# Altium PCB pwr_fpga.PcbDoc
Units mil, origin at the board's own origin, x right, y up, seen from the top; angles counter-clockwise.
Board outline 1185.04 x 1173.23 mil, 2 copper layers (Top Layer, Bottom Layer); 33 components, 21 nets, 94 pads, 108 vias.
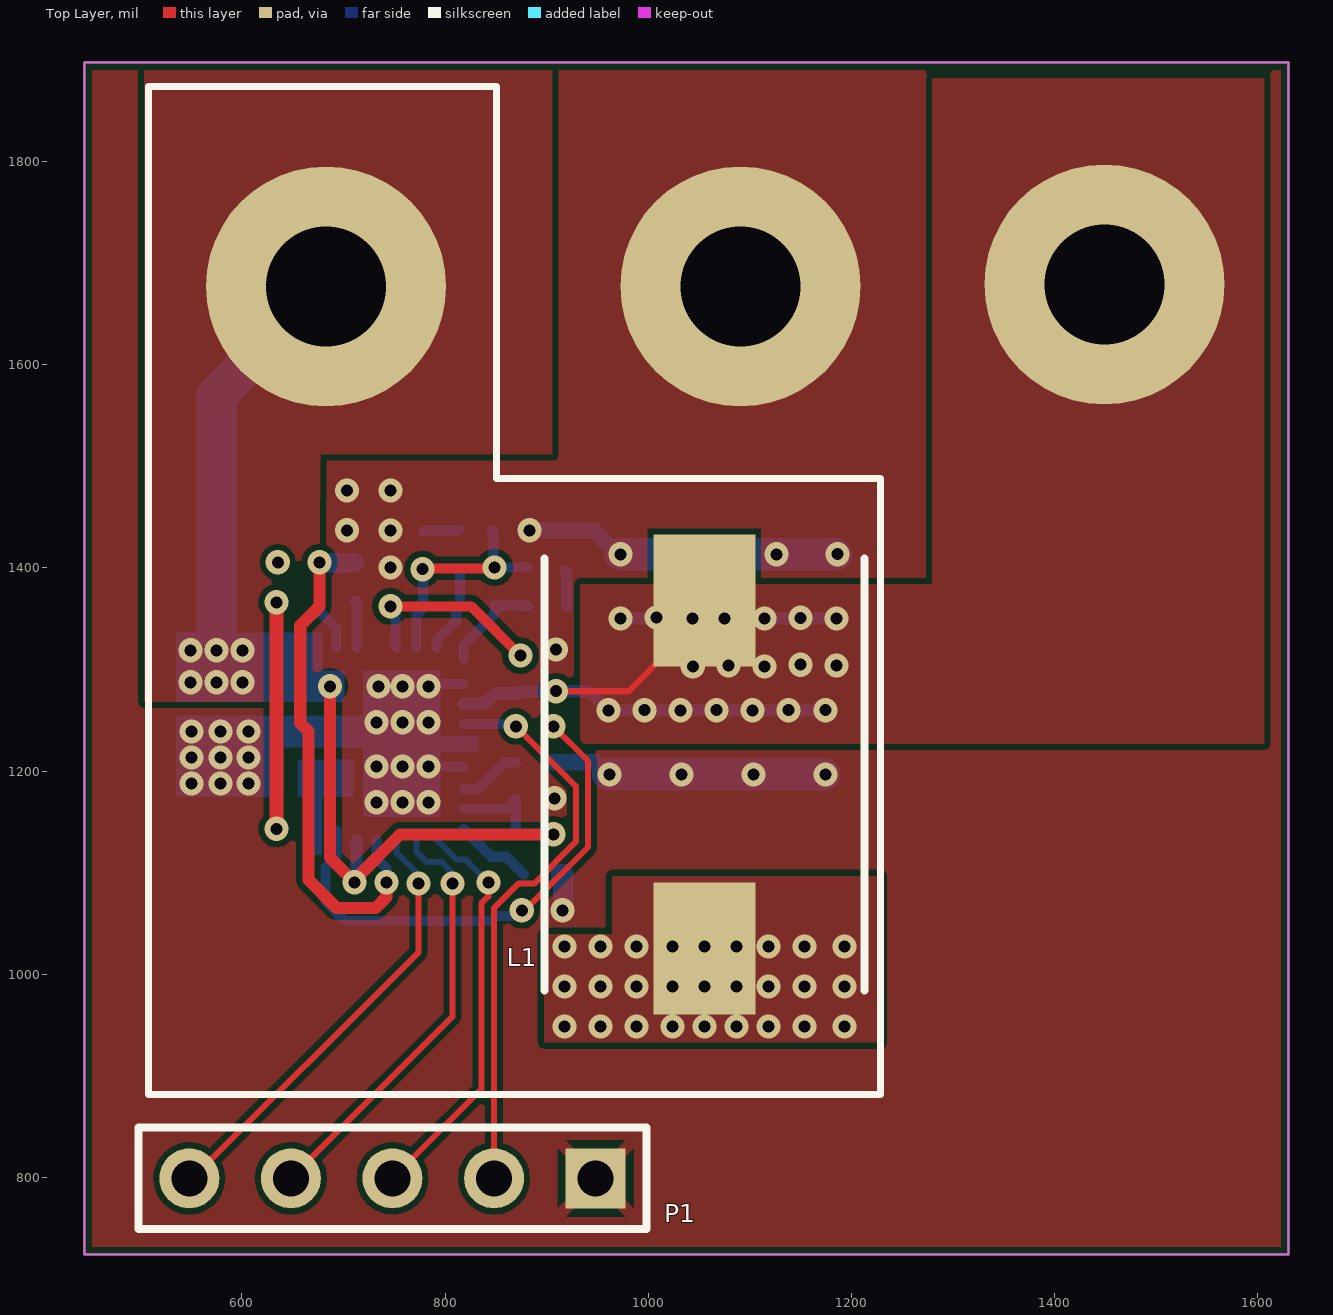
[diagram p0: Top Layer view]
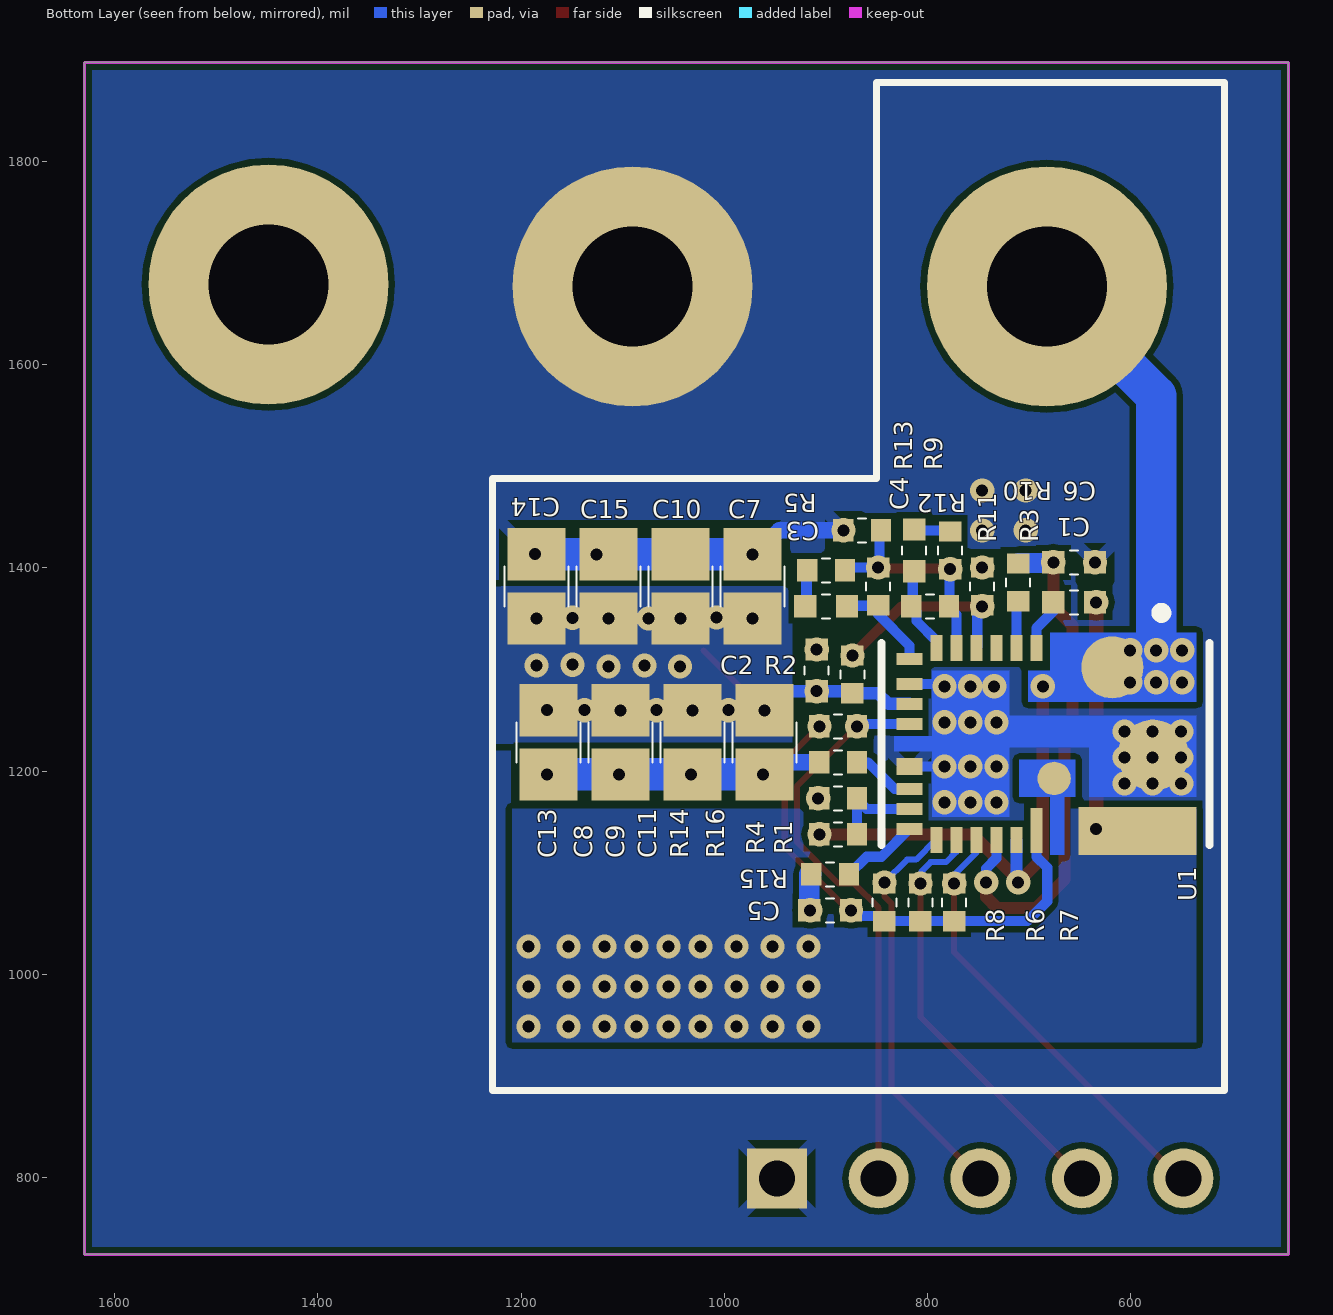
[diagram p1: Bottom Layer view, seen from below]
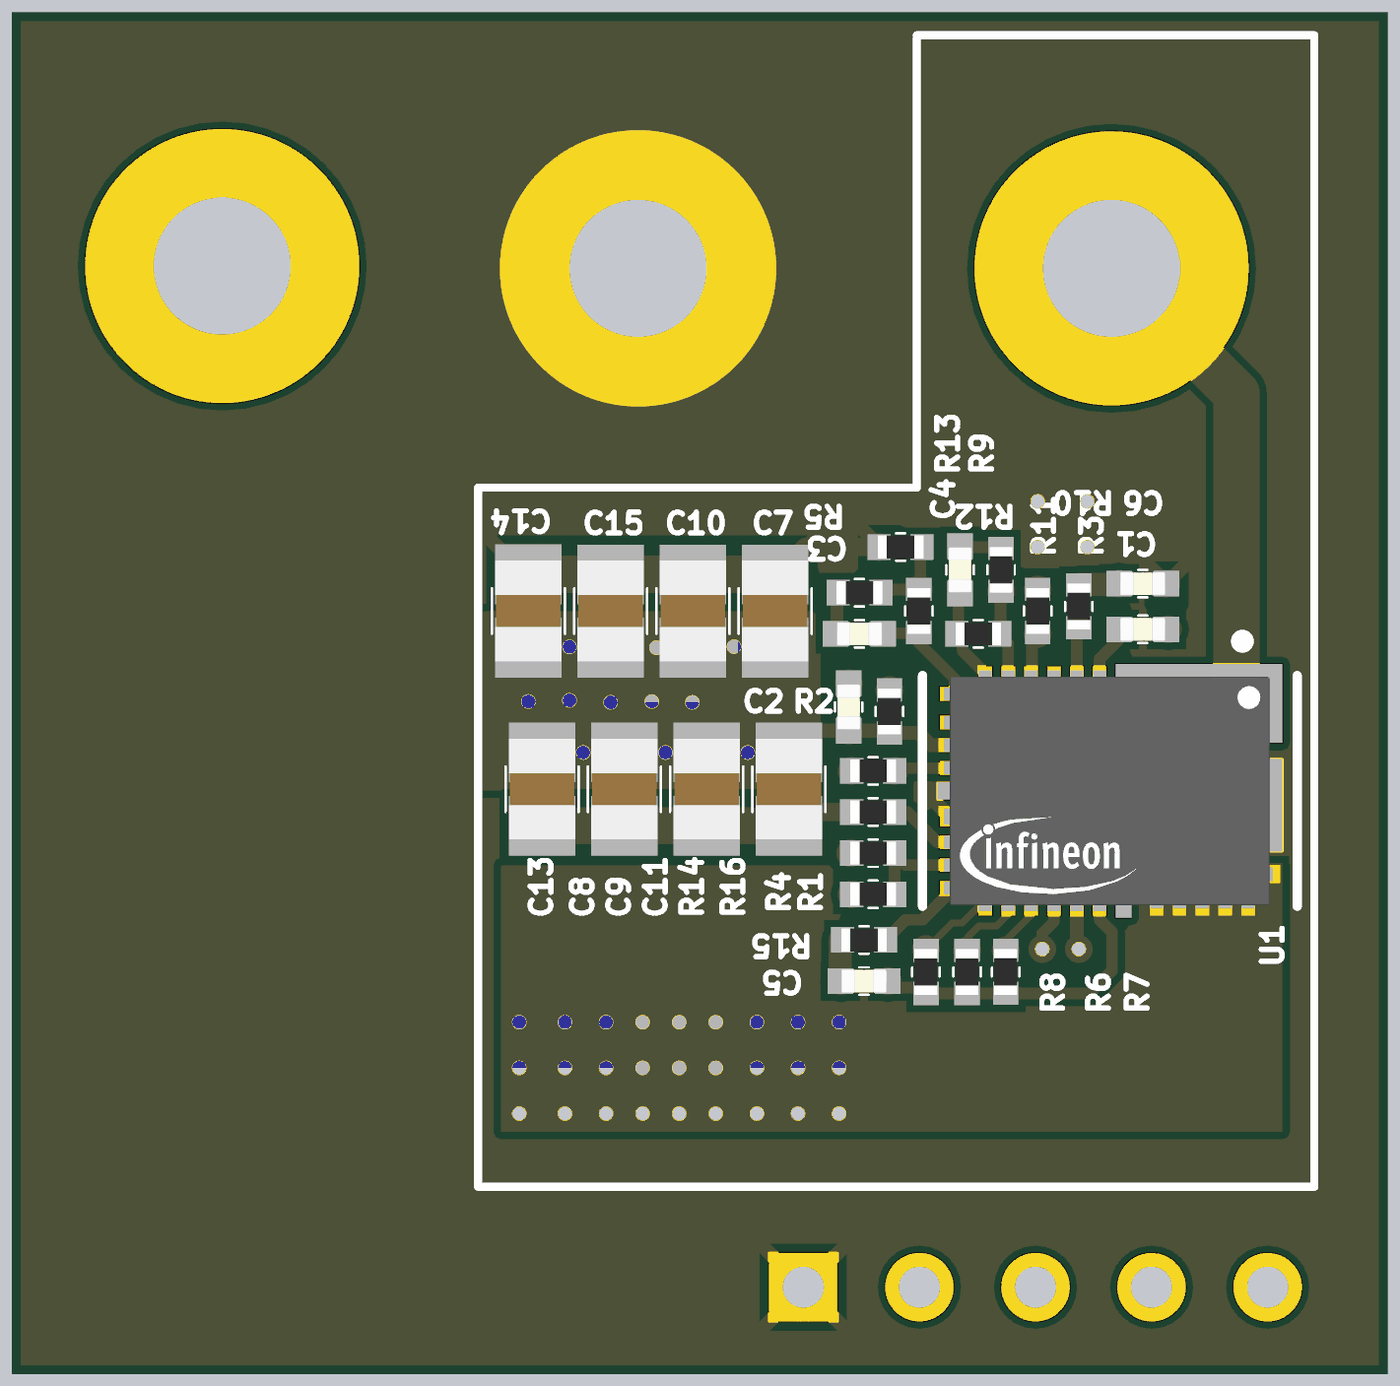
[diagram p2: 3D render of the assembled board from below, using the file's embedded part models]

## Layer stack, top to bottom
Top Solder: solder mask 0.4, Solder Resist, Dk 3.5
Top Layer: signal copper 1.4
Dielectric 1: dielectric 12.6, FR-4, Dk 4.8
Bottom Layer: signal copper 1.4
Bottom Solder: solder mask 0.4, Solder Resist, Dk 3.5

## Board outline
444.88,724.41 1629.92,724.41 1629.92,1897.64 444.88,1897.64

## Design rules (kind name [scope] priority, off if disabled: settings)
Clearance [All] p1: gap=6 ignorepadtopadclearanceinfootprint=FALSE except(0: Arc-Hole Track-Hole SMDPad-Hole THPad-Hole Via-Hole Fill-Hole Poly-Hole Region-Hole Text-Hole)
HoleSize [All] p1: absolutevalues=TRUE maxlimit=236.22 minlimit=1 maxpercent=80.000 minpercent=20.000
HoleToHoleClearance [All] p1: gap=3 allowstackedmicrovias=TRUE
MinimumSolderMaskSliver [All] p1: minsoldermaskwidth=1
PolygonConnect [All] p1: thpad.connectstyle=Relief thpad.reliefconductorwidth=12 thpad.reliefentries=4 thpad.polygonreliefangle="45 Angle" thpad.airgapwidth=8 smdpad.connectstyle=Relief smdpad.reliefconductorwidth=12 smdpad.reliefentries=4 smdpad.polygonreliefangle="45 Angle" smdpad.airgapwidth=8 via.connectstyle=Direct via.reliefconductorwidth=12 via.reliefentries=4 via.polygonreliefangle="45 Angle" via.airgapwidth=8
RoutingVias [All] p1: holewidth=15.75 width=23.62 viastyle="Through Hole" minholewidth=11.81 minwidth=19.68 maxholewidth=110.24 maxwidth=118.11
SilkToSilkClearance [All] p1: silktosilkclearance=3
SilkToSolderMaskClearance [IsPad] p1: minsilkscreentomaskgap=1 clearancetoexposedcopper=TRUE
SolderMaskExpansion [All] p1: expansion=1
Width [All] p1: maxlimit=40 minlimit=6 preferedwidth=10
25 further rules are at their usual default settings.

## Components (designator, comment, footprint, x,y, rotation, side; value= is the part's Value field where it differs from the comment)
C1 "0.1uF" "cap_UMK105 CG080CV-F_TAY" 655.71,1366.16 r180 bottom
C2 "0.1uF" "cap_UMK105 CG080CV-F_TAY" 909.11,1299.21 r270 bottom
C3 "0.1uF" "cap_UMK105 CG080CV-F_TAY" 899.8,1362.22 r0 bottom
C4 "0.1uF" "cap_UMK105 CG080CV-F_TAY" 813.19,1417.34 r90 bottom
C5 "2.2uF" "cap_UMK105 CG080CV-F_TAY" 895.87,1063.01 r180 bottom
C6 "2.2uF" "cap_UMK105 CG080CV-F_TAY" 655.71,1405.53 r0 bottom
C7 "47uF" CAPC220145_140N_KEM 972.44,1381.89 r270 bottom
C8 "47uF" CAPC220145_140N_KEM 1102.36,1228.35 r90 bottom
C9 "47uF" CAPC220145_140N_KEM 1031.5,1228.35 r90 bottom
C10 "47uF" CAPC220145_140N_KEM 1043.31,1381.89 r270 bottom
C11 "47uF" CAPC220145_140N_KEM 960.63,1228.35 r90 bottom
C13 "47uF" CAPC220145_140N_KEM 1173.23,1228.35 r90 bottom
C14 "47uF" CAPC220145_140N_KEM 1185.04,1381.91 r270 bottom
C15 "47uF" CAPC220145_140N_KEM 1114.17,1381.89 r270 bottom
L1 "FP1008R2/150nH" INDM10880X800N 1055.12,1196.85 r90 top
P1 "Header 5" HDR1X5 948.13,799.21 r180 top
R1 "3k83" 0402_PAN 887.99,1137.81 r0 bottom
R2 "0R" 0402_PAN 874.02,1295.28 r90 bottom
R3 "3k83" 0402_PAN 710.83,1385.85 r90 bottom
R4 "3k83" 0402_PAN 887.99,1244.11 r0 bottom
R5 "0R" 0402_PAN 899.8,1397.66 r0 bottom
R6 "3k83" 0402_PAN 807.09,1070.87 r270 bottom
R7 "3k83" 0402_PAN 773.82,1070.89 r270 bottom
R8 "3k83" 0402_PAN 842.52,1070.87 r270 bottom
R9 "0R" 0402_PAN 848.62,1381.91 r270 bottom
R10 "0R" 0402_PAN 777.76,1417.34 r90 bottom
R11 "0R" 0402_PAN 746.26,1381.91 r90 bottom
R12 "0R" 0402_PAN 797.44,1362.22 r0 bottom
R13 "0R" 0402_PAN 864.37,1437.03 r0 bottom
R14 "3k83" 0402_PAN 887.99,1173.25 r0 bottom
R15 "0R" 0402_PAN 895.87,1098.44 r180 bottom
R16 "3k83" 0402_PAN 887.99,1208.68 r180 bottom
U1 "IR38064MTRPBF" Infineon_Technologies_PG-IQFN-34_MFG 684.06,1226.87 r90 bottom

## Footprints (in the part's own frame and the unit in brackets; to place one, negate y for a bottom-side part, rotate by r counter-clockwise, add the part's x,y. Pads: shape width x height; smd on the part's side, far side on the other; paste and mask are expansions set on the pad)
0402_PAN [mil]
  rect 20x22 smd paste+0 mask+0: 1(-18.5,0) 2(18.5,0)
  silkscreen extent -4,-12 4,12, body extent -20,-10 20,10, height 14
"cap_UMK105 CG080CV-F_TAY" [mil]
  rect 22x22 smd paste+0 mask+0: 1(-20.5,0) 2(20.5,0)
  silkscreen extent -4,-12 4,12, body extent -20,-10 20,10, height 14
CAPC220145_140N_KEM [mm]
  rect 1.306x1.45 smd paste+0 mask+0: 1(-0.803,0) 2(0.803,0)
  silkscreen extent -0.5,-0.8 0.5,0.8, body extent -1.1,-0.72 1.1,0.73, height 1.4
HDR1X5 [mm] "Connector; Header; 5 Position"
  rect 1.5x1.5 hole 0.9: 1(0,0)
  round 1.5 hole 0.9: 2(2.54,0) 3(5.08,0) 4(7.62,0) 5(10.16,0)
  silkscreen extent -1.27,-1.27 11.43,1.27
INDM10880X800N [mm]
  rect 3.3x2.55 smd: 1(-4.35,0) 2(4.35,0)
  silkscreen extent -5.4,-4 5.4,4, body extent -5.4,-4 5.4,4, height 8
Infineon_Technologies_PG-IQFN-34_MFG [mm]
  round 1.552 smd paste-1000 mask-1000: 1(1.913,-1.675)
  rect 0.65x0.3 smd paste-1000 mask-1000: 2(2.4,0.225) 3(2.4,0.725) 4(2.4,1.225) 5(2.4,1.725) 6(2.4,2.225) 7(2.4,2.725) 17(-2.4,2.725) 18(-2.4,2.225) 19(-2.4,1.725) 20(-2.4,1.225) 21(-2.4,0.725)
  rect 0.3x0.65 smd paste-1000 mask-1000: 8(2.125,3.4) 9(1.5,3.4) 10(1,3.4) 11(0.5,3.4) 14(-1.125,3.4) 15(-1.625,3.4) 16(-2.125,3.4)
  round 1.773 smd paste-1000 mask-1000: 12-25(-0.285,-2.691)
  rect 0.425x0.65 smd paste-1000 mask-1000: 13(-0.563,3.4)
  rect 1.122x0.3 smd paste-1000 mask-1000: 22(-2.164,0.225)
  round 0.833 smd paste-1000 mask-1000: 23-26(-0.862,-0.22)
  rect 1.202x2.95 smd paste-1000 mask-1000: 24(-2.175,-2.3)
  Top Layer region: -2.776,-0.475 -2.776,-0.125 -1.324,-0.125 -1.324,0.65 -0.399,0.65 -0.399,-0.742 -1.324,-0.742 -1.324,-0.475
  Top Layer region: 2.776,-3.775 1.051,-3.775 1.051,0.425 1.826,0.425 1.826,-0.125 2.776,-0.125
  Top Layer region: -0.19,3.775 0.191,3.775 0.191,2.825 1.825,2.825 1.825,0.9 0.7,0.9 0.7,-3.775 -1.323,-3.775 -1.323,-1.093 -0.08,-1.093 -0.08,0.9 -1.825,0.9 -1.825,2.825 -0.19,2.825
  silkscreen extent -2.52,-4.1 3.4,4.1, body extent -2.5,-3.5 2.5,3.5, height 1.05

## Part data
C1 C2 C3 C4 C5 C6: library part TMK105B7103KV-F, "No Description Available", Built_By=EMA_UL_Team, Copyright="Copyright (C) 2018 Accelerated Designs. All rights reserved", Manufacturer_Part_Number=TMK105B7103KV-F, RefDes=RefDes, SourceLibrary=Taiyo_Yuden_2018-10-17, Type=DEV, Vendor="Taiyo Yuden"
C7 C8 C9 C10 C11 C13 C14 C15: library part C0805C475K4PAC, "No Description Available", Built_By=EMA_Frank, Copyright="Copyright (C) 2018 Accelerated Designs. All rights reserved", Manufacturer_Part_Number=C0805C475K4PAC, RefDes=RefDes, SourceLibrary=Kemet_2020-03-25_1b, Type=DEV, Vendor=Kemet
L1: library part FP1008R2-R120-R, "Inductor", Manufacturer_Name=Eaton, Mouser Part Number=704-FP1008R2-R120-R, Arrow Part Number=FP1008R2-R120-R, Datasheet Link=https://datasheet.octopart.com/FP1008R2-R120-R-Coiltronics-datasheet-49700686.pdf, Height=8mm, Manufacturer_Part_Number=FP1008R2-R120-R, Mouser Price/Stock=https://www.mouser.com/Search/Refine.aspx?Keyword=704-FP1008R2-R120-R
P1: "Header, 5-Pin", LatestRevisionDate=17-Jul-2002, LatestRevisionNote="Re-released for DXP Platform.", Publisher="Altium Limited"
R1 R2 R3 R4 R5 R6 R7 R8 R9 R10 R11 R12 R13 R14 R15 R16: library part ERJ2RHD2400X, "No Description Available", Built_By=EMA_UL_Team, Copyright="Copyright (C) 2018 Accelerated Designs. All rights reserved", Manufacturer_Part_Number=ERJ2RHD2400X, RefDes=RefDes, SourceLibrary=Panasonic_2016-11-1, Type=DEV, Vendor=Panasonic

## Free pads (board coordinates)
  round 236.22 hole 118.11: 2(682.65,1677.17) 2(1090.55,1677.17) 2(1448.82,1679.13)

## Via types
v1: diameter 23.86, hole 11.81, Top Layer to Bottom Layer, tented both sides, 108 vias

## Nets (pads, with @x,y where several pads share a name; then routed paths per layer and width w, separated by ;. In a path a pad name is that pad's centre, name@x,y a point inside that pad or via, vN(x,y) a via of type N, cw(c..) or ccw(c..) an arc to the next point about the centre after c; other vN are vias at no path point)
+0V9: C2.2 C7.2 C8.2 C9.2 C10.2 C11.2 C13.2 C14.2 C15.2 L1.2 pad.2@1448.82,1679.13 R2.1 U1.10 | length 709.1
  Top Layer w6: v1(909.11,1278.71) 980.48,1278.71 L1.2@1020.67,1318.9
  Bottom Layer w12: U1.10 818.01,1266.33 838.57,1266.33 849.02,1276.78 R2.1 875.95,1278.71 v1(909.11,1278.71) 941.87,1278.71 v1(960.63,1259.95) v1(1031.5,1259.95) v1(1102.36,1259.95) C13.2 ; v1(972.44,1350.28) v1(1043.31,1350.28) v1(1114.19,1350.3) ; v1(1114.19,1350.3) v1(1185.04,1350.3)
  other v1: 996.06,1259.97 1066.93,1259.97 1137.8,1259.97 1174.41,1259.97 1043.76,1303.15 1114.17,1303.15 1078.74,1303.9 1185.04,1303.9 1149.61,1304.87 1074.8,1350.28 1007.87,1351.18 1149.61,1351.01
+12V: pad.2@682.65,1677.17 R1.2 U1.1 U1.21 | length 864.9
  Top Layer w12: v1(686.57,1283.48) 686.57,1114.82 v1(710.82,1090.57) 710.82,1092.91 755.73,1137.81 v1(906.49,1137.81)
  Bottom Layer w12: v1(710.82,1090.57) 712.6,1092.34 U1.21
  Bottom Layer w40: v1(575.02,1318.92) 575.02,1569.54 pad.2@682.65,1677.17
  other v1: 549.41,1287.42 575.02,1287.42 600.59,1287.42 549.41,1318.92 600.59,1318.92
DCDC_1V8: C6.2 R3.2 U1.20 | length 545.3
  Top Layer w12: v1(676.21,1405.53) 676.21,1362.15 657.41,1343.35 657.41,1247.24 665.35,1239.3 665.35,1093.12 693.09,1065.38 731.55,1065.38 742.32,1076.15 v1(742.32,1090.57)
  Bottom Layer w10: C6.2@676.8,1404.94 v1(676.21,1405.53) 709.64,1405.53 R3.2@710.23,1404.94 ; U1.20 732.28,1114.19 742.32,1104.15 v1(742.32,1090.57)
  Bottom Layer w20: C6.2@676.8,1404.94 R3.2@710.23,1404.94
DCDC_SW: C1.2 L1.1 U1.24 | length 222.9
  Top Layer w14: v1(634.04,1143.23) v1(634.04,1366.16)
  other v1: 917.32,948.82 952.76,948.82 988.19,948.82 1023.62,948.82 1055.12,948.82 1086.61,948.82 1118.11,948.82 1153.54,948.82 1192.91,948.82 917.32,988.19 952.76,988.19 988.19,988.19 1023.62,988.19 1055.12,988.19 1086.61,988.19 1118.11,988.19 1153.54,988.19 1192.91,988.19 917.32,1027.56 952.76,1027.56 988.19,1027.56 1023.62,1027.56 1055.12,1027.56 1086.61,1027.56 1118.11,1027.56 1153.54,1027.56 1192.91,1027.56
EN_FCCM: R1.1 R14.1 U1.15 | length 90.9
  Bottom Layer w10: U1.15 860.14,1162.89 R14.1@869.49,1172.25 ; R1.1 R14.1@869.49,1172.25 ; R14.1 R14.1@869.49,1172.25
GND: C2.1 C5.1 C6.1 C7.1 C8.1 C9.1 C10.1 C11.1 C13.1 C14.1 C15.1 P1.1 pad.2@1090.55,1677.17 R11.2 R13.2 R14.2 R15.1 R16.1 U1.9 U1.12-25 U1.13 | length 688.1
  Bottom Layer w10: v1(783.46,1204.72) U1.13 ; v1(783.46,1283.48) 785.91,1285.93 U1.9
  Bottom Layer w16: v1(882.87,1437.03) 946.07,1437.03 C7.1@969.6,1413.5 ; R16.1 948.69,1208.68 C11.1
  Bottom Layer w20: R15.1 916.37,1098.44 C5.1
  Bottom Layer w32: C11.1 C9.1 C8.1 C13.1 ; v1(972.44,1413.5) C10.1 C15.1 ; C15.1 C14.1
  other v1: 915.55,1063.01 732.28,1169.31 757.89,1169.31 783.46,1169.31 907.68,1173.25 550.39,1187.9 578.74,1187.9 606.3,1187.9 961.81,1196.76 1032.68,1196.76 1103.55,1196.76 1174.41,1196.76 732.28,1204.72 757.89,1204.72 550.39,1213.51 578.74,1213.51 606.3,1213.51 550.39,1239.08 578.74,1239.08 606.3,1239.08 732.28,1248.05 757.89,1248.05 783.46,1248.05 734.45,1283.48 757.89,1283.48 909.11,1319.71 746.26,1400.41 635.21,1405.53 1125.98,1413.51 1186.22,1413.54 703.46,1437.03 746.26,1437.01 703.46,1476.38 746.26,1476.38
NetC1_1: C1.1 U1.2 | length 51.7
  Bottom Layer w10: C1.1 676.21,1357.47 692.91,1340.77 U1.2
NetC3_1: C3.1 R9.2 U1.8 | length 99.5
  Bottom Layer w10: U1.8 817.91,1323.64 848.62,1354.35 R9.2 849.21,1362.82 881.46,1362.82 C3.1@882.06,1362.22
NetC3_2: C3.2 R5.2 | length 36.3
  Bottom Layer w11: R5.2 919.3,1396.66 919.3,1363.22 C3.2
NetC4_1: C4.1 R12.2 U1.7 | length 86.8
  Bottom Layer w10: U1.7 791.34,1328.25 810.94,1347.85 810.94,1357.22 R12.2 814.57,1363.6 814.57,1395.47 C4.1
NetC4_2: C4.2 R10.2 | length 35.9
  Bottom Layer w10: R10.2@778.94,1435.84 779.94,1436.84 812.98,1436.84 C4.2@813.98,1437.84
NetC5_2: C5.2 R4.2 R6.2 R7.2 R8.2 U1.22 | length 503.7
  Top Layer w6: v1(875.37,1063.01) 878.26,1063.01 940.61,1125.36 940.61,1210 v1(906.49,1244.11)
  Bottom Layer w10: U1.22 692.91,1115.8 682.24,1105.13 682.24,1071.91 701.77,1052.39 R7.2 809.25,1052.39 844.69,1052.39 849.69,1057.39 869.74,1057.39 v1(875.37,1063.01)
NetR2_2: R2.2 R11.1 U1.5 | length 192.2
  Top Layer w10: v1(746.26,1362.22) 825.57,1362.22 v1(874.02,1313.78)
  Bottom Layer w10: R11.1 751.06,1358.61 751.06,1322.26 U1.5
NetR3_1: R3.1 U1.3 | length 47.8
  Bottom Layer w10: R3.1 712.6,1367.35 U1.3
NetR5_1: R5.1 R9.1 R10.1 R12.1 R13.1 U1.6 | length 223.2
  Top Layer w10: v1(777.76,1398.84) 778.54,1399.63 847.84,1399.63 v1(848.62,1400.41)
  Bottom Layer w10: U1.6 771.65,1353.94 778.94,1361.22 R12.1 778.35,1362.82 778.35,1398.25 v1(777.76,1398.84) ; R13.1 847.25,1435.65 847.25,1401.79 v1(848.62,1400.41) 881.3,1400.41 R5.1@881.49,1400.6
NetR15_2: R15.2 U1.16 | length 78
  Bottom Layer w10: U1.16 845.31,1115.81 860,1115.81 R15.2
NetR16_2: R16.2 U1.14 | length 62.4
  Bottom Layer w10: U1.14 832.49,1182.58 858.59,1208.68 R16.2
PGOOD: P1.2 R4.1 U1.11 | length 564.4
  Top Layer w6: P1.2 848.13,1065.38 872.14,1089.39 887.66,1089.39 928.61,1130.33 928.61,1185 v1(869.49,1244.11)
  Bottom Layer w10: U1.11 867.05,1246.56 v1(869.49,1244.11)
SAL_TMON: P1.3 R8.1 U1.17 | length 398.9
  Top Layer w6: P1.3 835.7,886.77 835.7,1069.91 842.52,1076.73 v1(842.52,1090.55)
  Bottom Layer w6: U1.17 791.89,1132.38 811.29,1112.99 820.08,1112.99 v1(842.52,1090.55)
SCL: P1.5 R7.1 U1.19 | length 437.5
  Top Layer w6: P1.5 551.18,799.21 773.82,1021.85 v1(773.82,1089.39)
  Bottom Layer w6: U1.19 751.97,1119.92 773.82,1098.07 v1(773.82,1089.39)
SDA: P1.4 R6.1 U1.18 | length 423.1
  Top Layer w6: P1.4 807.09,958.16 v1(807.09,1089.37)
  Bottom Layer w6: U1.18 771.65,1120.64 781.87,1110.42 796.88,1110.42 806.09,1101.22 806.09,1089.37 v1(807.09,1089.37)
pads on no net: U1.4 U1.23-26

## Polygon pours and split planes (outlines as drawn)
+12V on Top Layer "+12V_L01_P008" (solid, remove dead copper, pour order 8): 675.7,1268.23 503.94,1268.23 503.94,1897.64 905.51,1897.64 905.51,1511.81 676.83,1511.81
+0V9 on Top Layer "+0V9_L01_P010" (solid, remove dead copper, pour order 10): 1606.3,1881.89 1279.53,1881.89 1279.53,1384.01 933.07,1384.01 933.07,1227.23 1606.3,1227.23
DCDC_SW on Top Layer "DCDC_SW_L01_P012" (solid, remove dead copper, pour order 12): 1228.35,1096.55 964.57,1096.55 964.57,1039.37 897.64,1039.37 897.64,933.07 1228.35,933.07
GND on Top Layer "GND_L01_P016" (solid, remove dead copper, pour order 16): 417.32,1968.5 1661.42,1968.5 1661.42,610.24 417.32,610.24
GND on Bottom Layer "GND_L02_P020" (solid, remove dead copper, pour order 20): 421.26,1952.76 421.26,1480.31 421.26,633.86 1669.29,633.86 1669.29,1952.76
+0V9 on Bottom Layer "+0V9_L02_P018" (solid, remove dead copper, pour order 18): 933.07,1384.01 1224.41,1384.01 1224.41,1227.23 933.07,1227.23
DCDC_SW on Bottom Layer "DCDC_SW_L02_P014" (solid, remove dead copper, pour order 14): 1208.66,1162.89 535.43,1162.89 535.43,933.07 1208.66,933.07

## Keep-outs
Keep-Out Layer:
  the board outline again, w3

## Silkscreen, mask and mechanical layers (free items; w line width, h text height)
Top Overlay:
  lines w7: 507.87,881.89 507.87,1874.02 850.39,1874.02 850.39,1488.19 1228.35,1488.19 1228.35,881.89 507.87,881.89
Bottom Overlay:
  lines w7: 507.87,885.83 1228.35,885.83 1228.35,1488.19 850.39,1488.19 850.39,1877.95 507.87,1877.95 507.87,885.83